# Altium PCB TP7660H.pcbdoc
Units mm, origin at the board's own origin, x right, y up, seen from the top; angles counter-clockwise.
Board outline 30.8 x 33.83 mm, 2 copper layers (Top Layer, Bottom Layer); 1 components, 0 nets, 8 pads, 0 vias.
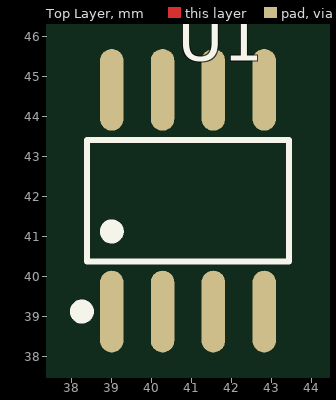
[diagram p0: Top Layer view]
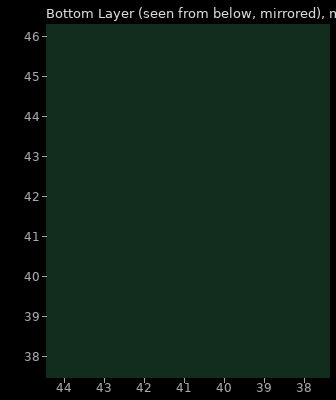
[diagram p1: Bottom Layer view, seen from below]

## Layer stack, top to bottom
Top Layer: signal copper (thickness not stored)
Dielectric: dielectric 0.32, FR-4, Dk 4.8
Bottom Layer: signal copper (thickness not stored)

## Board outline
56.204,25.4 25.4,25.4 25.4,59.231 56.204,59.231

## Components (designator, comment, footprint, x,y, rotation, side; value= is the part's Value field where it differs from the comment)
U1 "SOIC-8_L4.9-W3.9-P1.27-LS6.0-BL" SOIC-8_L4.9-W3.9-P1.27-LS6.0-BL 40.902,41.895 r0 top

## Footprints (in the part's own frame and the unit in brackets; to place one, negate y for a bottom-side part, rotate by r counter-clockwise, add the part's x,y. Pads: shape width x height; smd on the part's side, far side on the other; paste and mask are expansions set on the pad)
SOIC-8_L4.9-W3.9-P1.27-LS6.0-BL [mm]
  oval 0.588x2.045 smd: 1(-1.905,-2.773) 2(-0.635,-2.773) 3(0.635,-2.773) 4(1.905,-2.773) 5(1.905,2.773) 6(0.635,2.773) 7(-0.635,2.773) 8(-1.905,2.773)
  silkscreen extent -2.8,-2.92 2.53,1.52

## Nets (pads, with @x,y where several pads share a name; then routed paths per layer and width w, separated by ;. In a path a pad name is that pad's centre, name@x,y a point inside that pad or via, vN(x,y) a via of type N, cw(c..) or ccw(c..) an arc to the next point about the centre after c; other vN are vias at no path point)
pads on no net: U1.1 U1.2 U1.3 U1.4 U1.5 U1.6 U1.7 U1.8